# Altium PCB Kame_EXP_BRK.PcbDoc
Units mm, origin at the board's own origin, x right, y up, seen from the top; angles counter-clockwise.
Board outline 26 x 35 mm, 4 copper layers (Top, GND, L3, Bottom), stack 0.806 mm thick; 48 components, 28 nets, 191 pads, 91 vias.
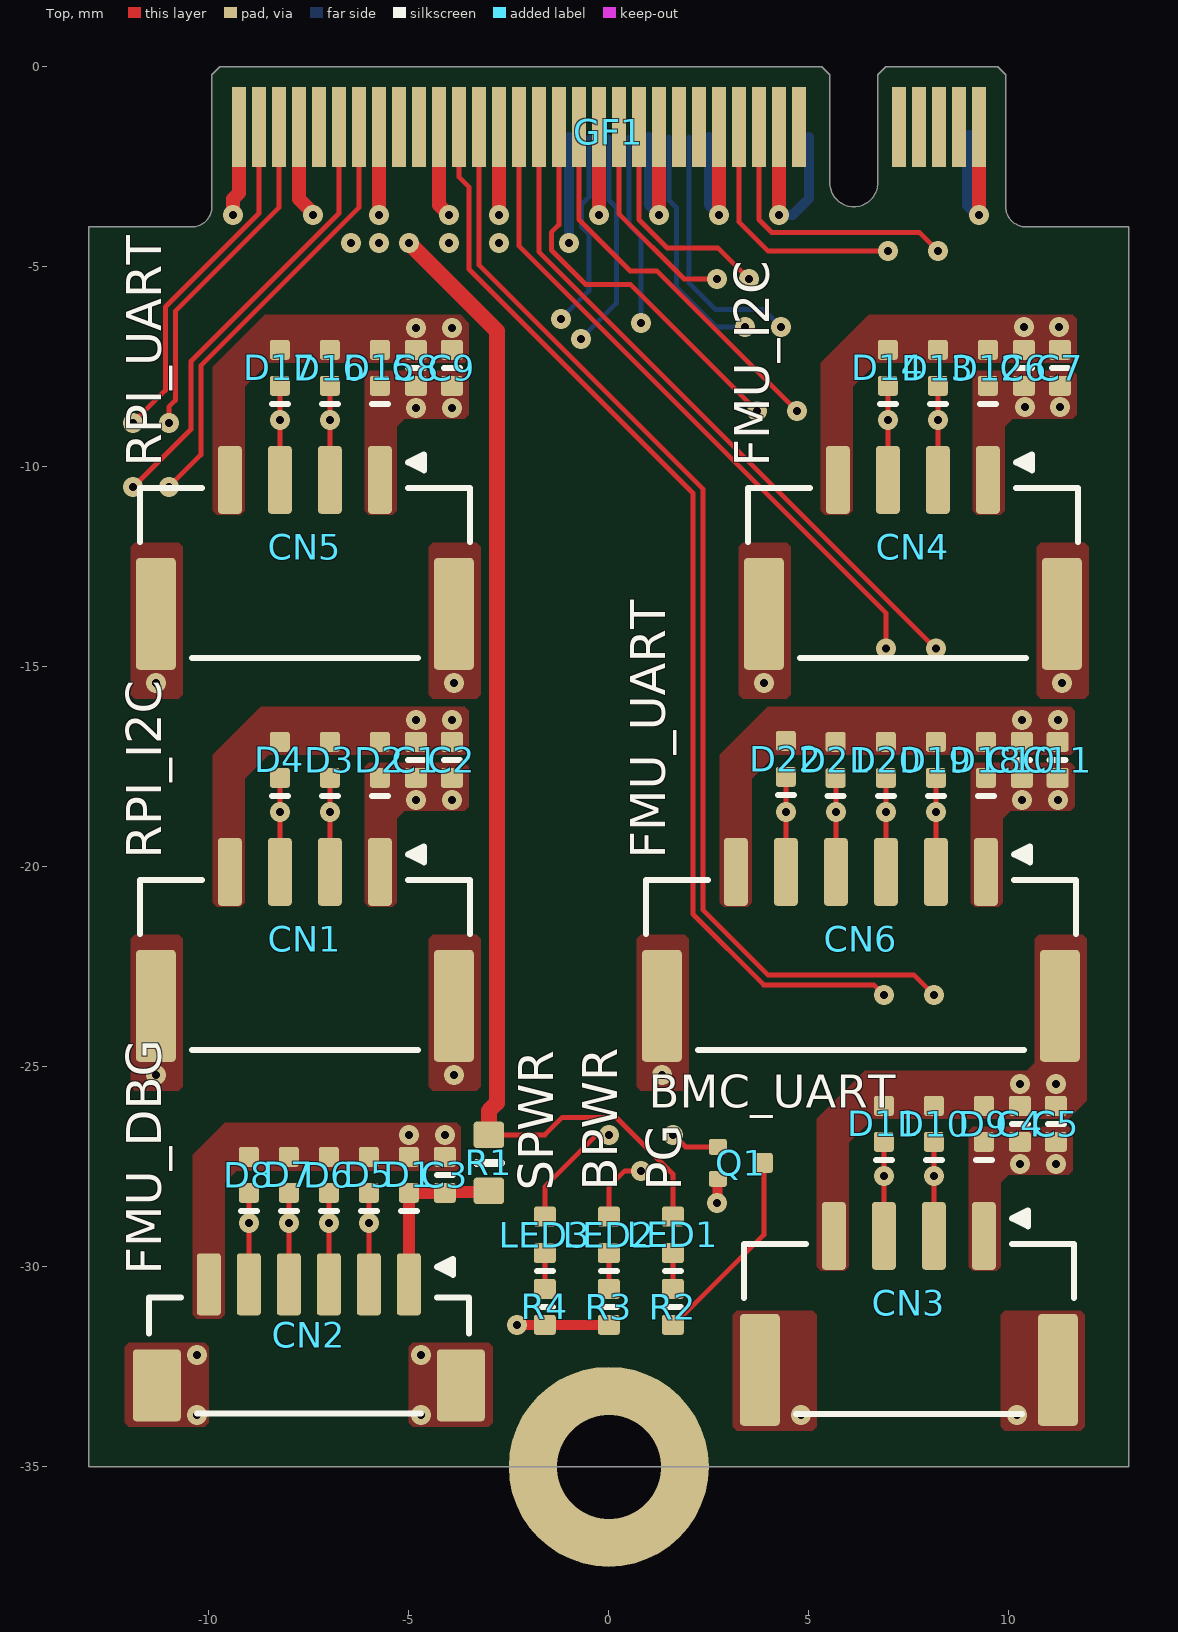
[diagram p0: Top view]
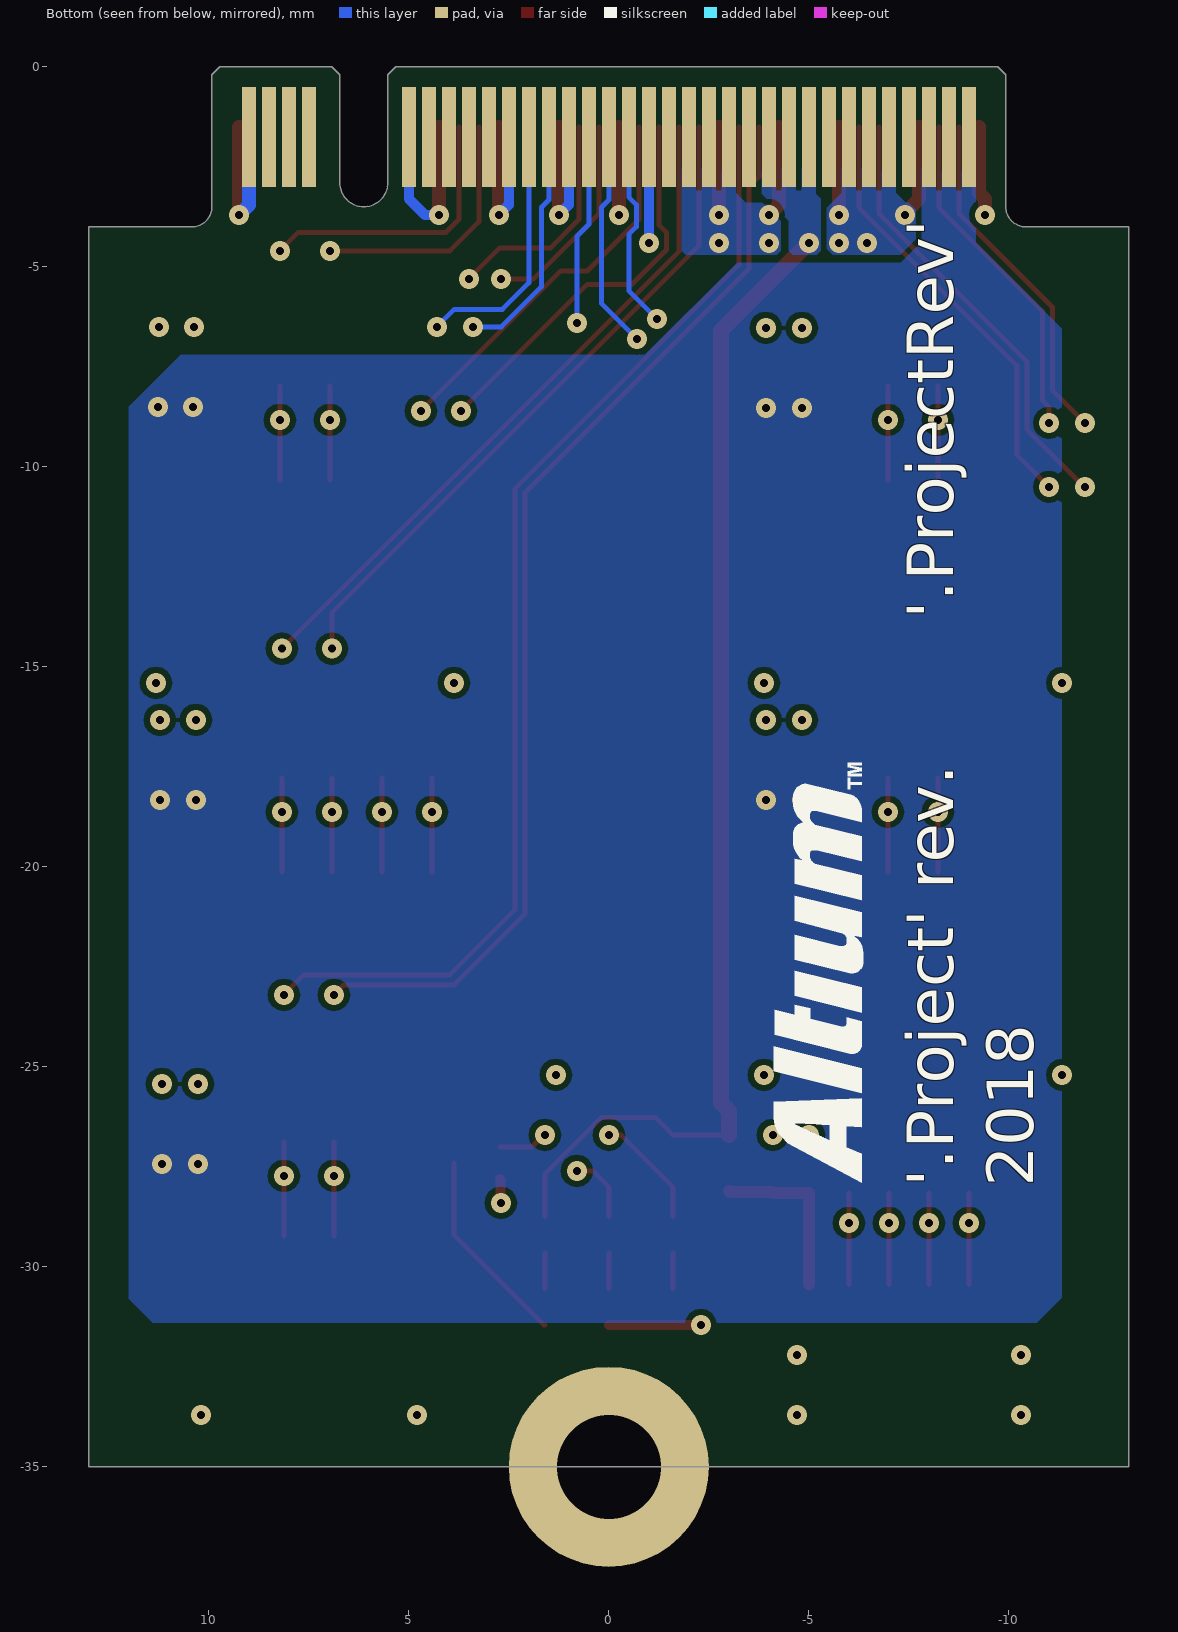
[diagram p1: Bottom view, seen from below]
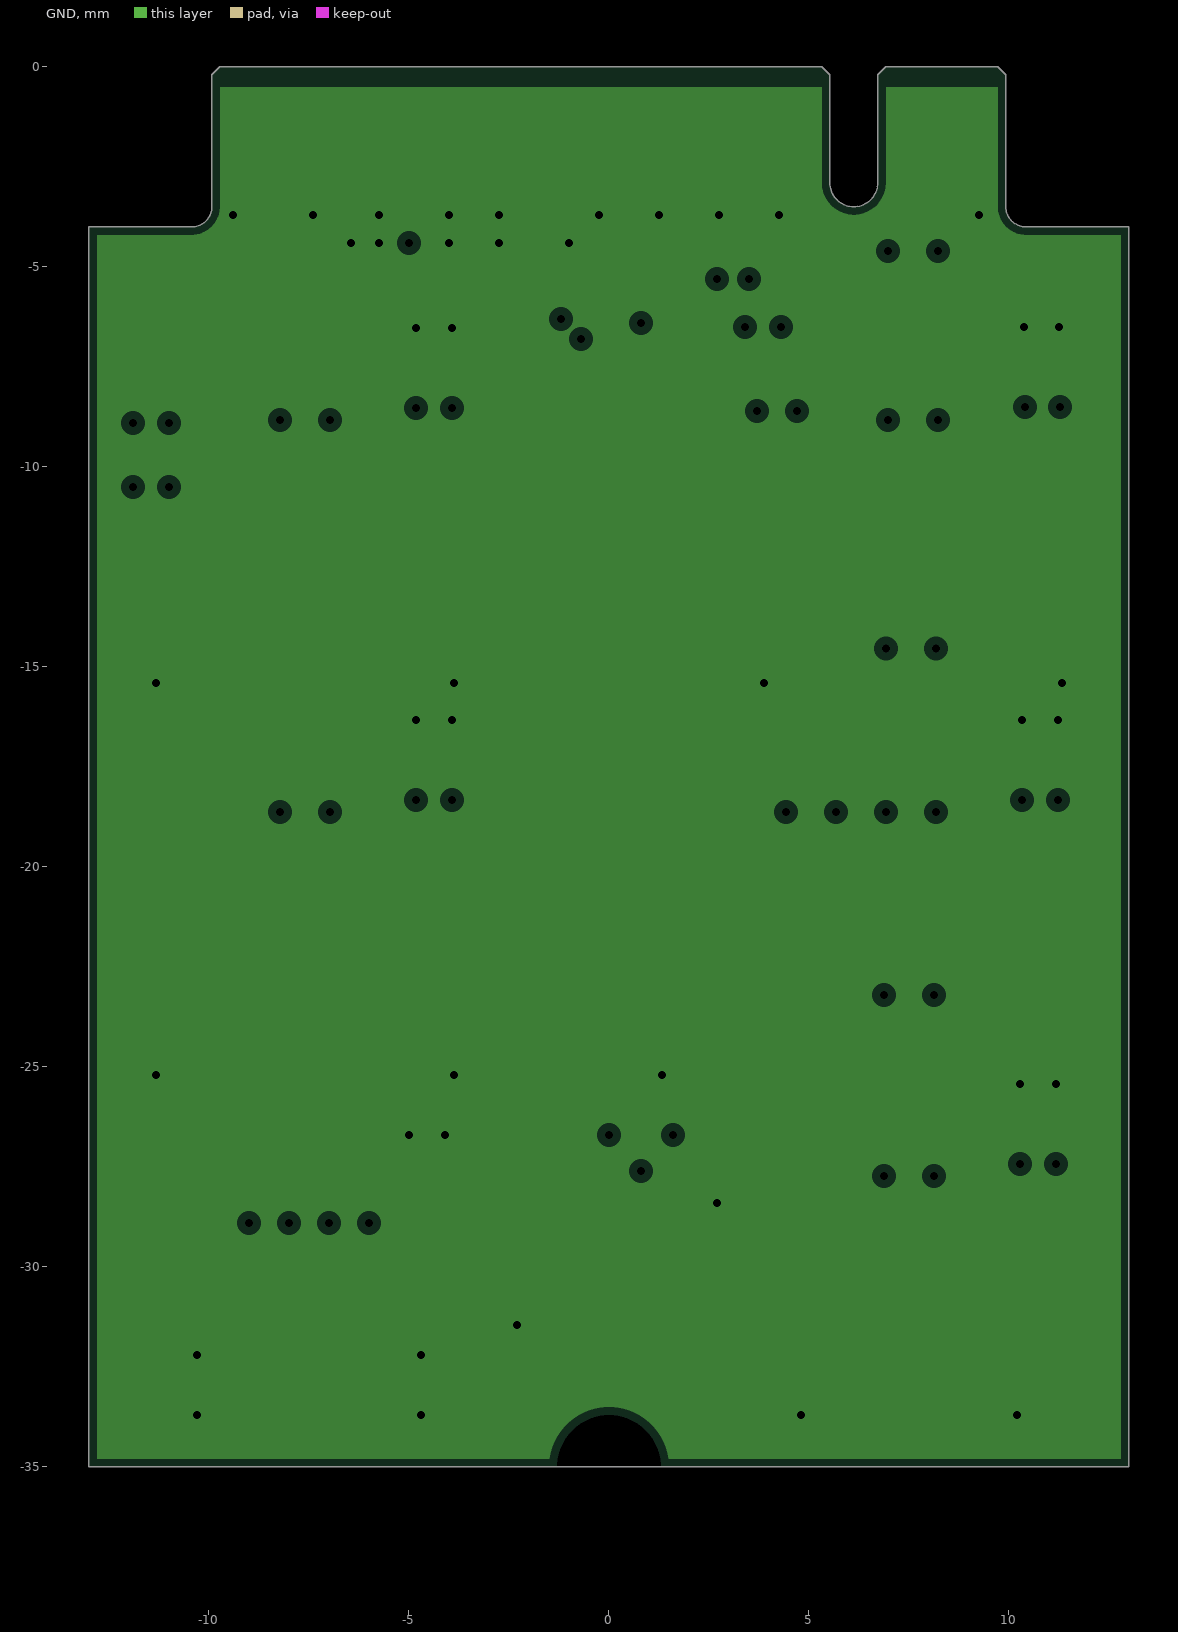
[diagram p2: GND, clearances drawn from the general rule]
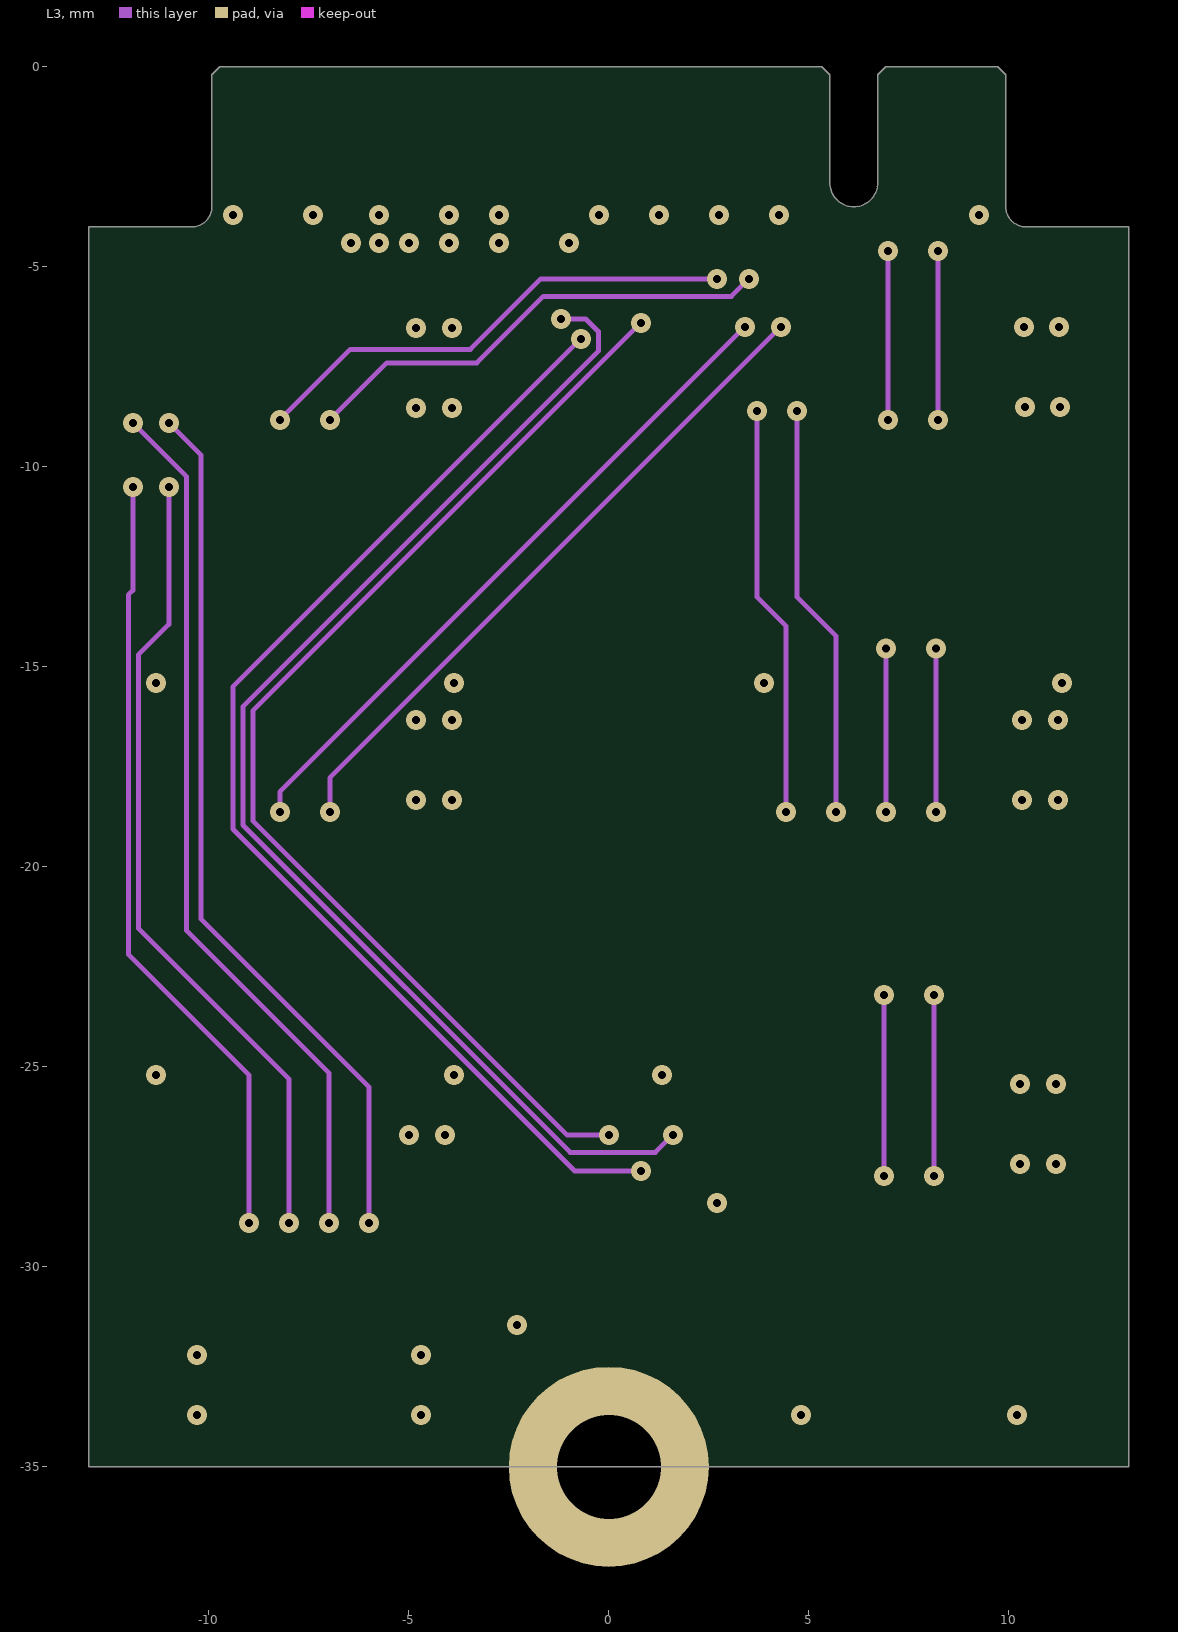
[diagram p3: L3]
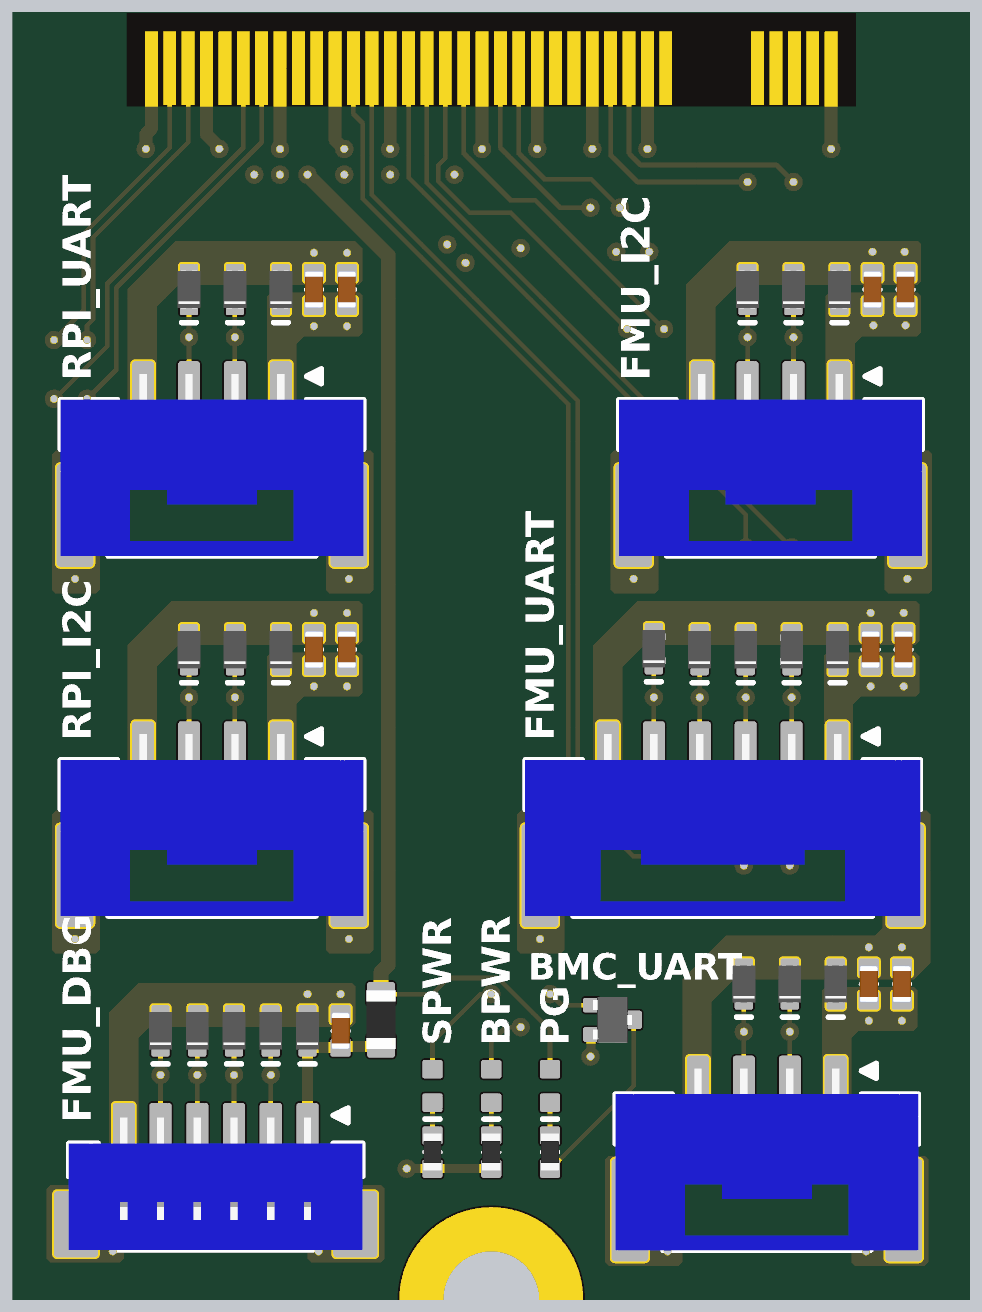
[diagram p4: 3D render of the assembled board from above, using the file's embedded part models]

## Layer stack, top to bottom
Top Solder: solder mask 0.0102, Solder Resist, Dk 3.5
Top: signal copper 0.0178
D1: dielectric 0.1, FR-4, Dk 4.2
GND: plane copper 0.035, net GND
D2: core 0.5, Core-009, Dk 4.6
L3: signal copper 0.035
D3: prepreg 0.1, PP-006, Dk 4.2
Bottom: signal copper 0.018
Bottom Solder: solder mask 0.0102, Solder Resist, Dk 3.5

## Board outline
-9.925,-0.2 -9.925,-3.5 cw(c-10.425,-3.5) -10.425,-4 -13,-4 -13,-35 13,-35 13,-4 10.425,-4 cw(c10.425,-3.5) 9.925,-3.5 9.925,-0.2 9.725,0 6.925,0 6.725,-0.2 6.725,-2.9 cw(c6.125,-2.9) 6.125,-3.5 cw(c6.125,-2.9) 5.525,-2.9 5.525,-0.2 5.325,0 -9.725,0

## Design rules (kind name [scope] priority, off if disabled: settings)
BoardOutlineClearance [All] p1: gap=0.25 ignorepadtopadclearanceinfootprint=FALSE
Clearance "Polygon clearance" [InPolygon and (OnLayer('Top') or OnLayer('Bottom') or OnLayer('L3'))] p1: gap=0.15 ignorepadtopadclearanceinfootprint=FALSE except(0.2: Arc-Hole Track-Hole SMDPad-Hole THPad-Hole Via-Hole Fill-Hole Poly-Hole Region-Hole Text-Hole)
Clearance [All] p2: gap=0.125 ignorepadtopadclearanceinfootprint=FALSE
HoleSize [All] p1: absolutevalues=TRUE maxlimit=6 minlimit=0.2 maxpercent=80.000 minpercent=20.000
HoleToHoleClearance [All] p1: gap=0.2 allowstackedmicrovias=FALSE
MinimumAnnularRing [All] p1: minimumring=0.15
MinimumSolderMaskSliver [All] p1: minsoldermaskwidth=0.15
NetAntennae [All] p1 off: netantennaetolerance=0
PlaneClearance [All] p1: clearance=0.2
PlaneConnect [All] p1: planeconnectstyle=Direct reliefexpansion=0.15 reliefentries=4 reliefconductorwidth=0.25 reliefairgap=0.2
PolygonConnect [All] p1: connectstyle=Direct reliefconductorwidth=0.25 reliefentries=4 polygonreliefangle="90 Angle" airgapwidth=0.2
RoutingVias [All] p1: holewidth=0.2 width=0.5 viastyle="Through Hole" minholewidth=0.2 minwidth=0.5 maxholewidth=0.3 maxwidth=0.6
SilkToSilkClearance [All] p1: silktosilkclearance=0.1
SilkToSolderMaskClearance [IsPad] p1: minsilkscreentomaskgap=0.1 clearancetoexposedcopper=TRUE
SolderMaskExpansion [All] p1: expansion=0.05 istentingtop=FALSE
Width [All] p1: maxlimit=0.8 minlimit=0.125 preferedwidth=0.125
22 further rules are at their usual default settings.

## Classes and differential pairs
component class 1_mb_conn: GF1

## Components (designator, comment, footprint, x,y, rotation, side; value= is the part's Value field where it differs from the comment)
C1 "Capacitor 10nF +/-20% 50V 0402" CAPC0402(1005)60_L -4.825,-17.325 r90 top value=10nF
C2 "Capacitor 100nF +/-20% 10V 0402" CAPC0402(1005)60_L -3.925,-17.325 r90 top value=100nF
C3 "Capacitor 100nF +/-20% 10V 0402" CAPC0402(1005)60_L -4.1,-27.7 r90 top value=100nF
C4 "Capacitor 10nF +/-20% 50V 0402" CAPC0402(1005)60_L 10.275,-26.425 r90 top value=10nF
C5 "Capacitor 100nF +/-20% 10V 0402" CAPC0402(1005)60_L 11.175,-26.425 r90 top value=100nF
C6 "Capacitor 10nF +/-20% 50V 0402" CAPC0402(1005)60_L 10.375,-7.525 r90 top value=10nF
C7 "Capacitor 100nF +/-20% 10V 0402" CAPC0402(1005)60_L 11.275,-7.525 r90 top value=100nF
C8 "Capacitor 10nF +/-20% 50V 0402" CAPC0402(1005)60_L -4.825,-7.525 r90 top value=10nF
C9 "Capacitor 100nF +/-20% 10V 0402" CAPC0402(1005)60_L -3.925,-7.525 r90 top value=100nF
C10 "Capacitor 10nF +/-20% 50V 0402" CAPC0402(1005)60_L 10.325,-17.325 r90 top value=10nF
C11 "Capacitor 100nF +/-20% 10V 0402" CAPC0402(1005)60_L 11.22,-17.325 r90 top value=100nF
CN1 "BM04B-GHS-TBT" JST-BM04B-GHS-TBT_V -7.6,-21.8 r180 top
CN2 "BM06B-SRSS-TB" JST-BM06B-SRSS-TB_V -7.5,-31.7 r180 top
CN3 "BM04B-GHS-TBT" JST-BM04B-GHS-TBT_V 7.5,-30.9 r180 top
CN4 "BM04B-GHS-TBT" JST-BM04B-GHS-TBT_V 7.6,-12 r180 top
CN5 "BM04B-GHS-TBT" JST-BM04B-GHS-TBT_V -7.6,-12 r180 top
CN6 "BM06B-GHS-TBT" JST-BM06B-GHS-TBT_V 6.3,-21.8 r180 top
D1 "ESDALC5-1BM2" STM-SOD-882_V -5,-27.7 r90 top
D2 "ESDALC5-1BM2" STM-SOD-882_V -5.725,-17.325 r90 top
D3 "ESDALC5-1BM2" STM-SOD-882_V -6.975,-17.325 r90 top
D4 "ESDALC5-1BM2" STM-SOD-882_V -8.225,-17.325 r90 top
D5 "ESDALC5-1BM2" STM-SOD-882_V -6,-27.7 r90 top
D6 "ESDALC5-1BM2" STM-SOD-882_V -7,-27.7 r90 top
D7 "ESDALC5-1BM2" STM-SOD-882_V -8,-27.7 r90 top
D8 "ESDALC5-1BM2" STM-SOD-882_V -9,-27.7 r90 top
D9 "ESDALC5-1BM2" STM-SOD-882_V 9.375,-26.425 r90 top
D10 "ESDALC5-1BM2" STM-SOD-882_V 8.125,-26.425 r90 top
D11 "ESDALC5-1BM2" STM-SOD-882_V 6.875,-26.425 r90 top
D12 "ESDALC5-1BM2" STM-SOD-882_V 9.475,-7.525 r90 top
D13 "ESDALC5-1BM2" STM-SOD-882_V 8.225,-7.525 r90 top
D14 "ESDALC5-1BM2" STM-SOD-882_V 6.975,-7.525 r90 top
D15 "ESDALC5-1BM2" STM-SOD-882_V -5.725,-7.525 r90 top
D16 "ESDALC5-1BM2" STM-SOD-882_V -6.975,-7.525 r90 top
D17 "ESDALC5-1BM2" STM-SOD-882_V -8.225,-7.525 r90 top
D18 "ESDALC5-1BM2" STM-SOD-882_V 9.425,-17.325 r90 top
D19 "ESDALC5-1BM2" STM-SOD-882_V 8.175,-17.325 r90 top
D20 "ESDALC5-1BM2" STM-SOD-882_V 6.925,-17.325 r90 top
D21 "ESDALC5-1BM2" STM-SOD-882_V 5.67,-17.325 r90 top
D22 "ESDALC5-1BM2" STM-SOD-882_V 4.425,-17.3 r90 top
GF1 "NGFF-M-CN-2S-M-R67" NGFF-M-GF-2D-500-1K-S67 0,-1.5 r0 top locked
LED1 "QBLP595-IG" QTB-QBLP595_V 1.6,-29.2 r90 top
LED2 "QBLP595-IG" QTB-QBLP595_V 0,-29.2 r90 top
LED3 "QBLP595-IG" QTB-QBLP595_V -1.6,-29.2 r90 top
Q1 "RUM002N05T2L" ROHM-SOT723-3_V 3.3,-27.4 r0 top
R1 "Jumper 0603" RESC0603(1608)_L -3,-27.4 r270 top value=0
R2 "Resistor 10K  +/-1 % 0402 63 mW" RESC0402(1005)_L 1.6,-31 r270 top value=10k
R3 "Resistor 10K  +/-1 % 0402 63 mW" RESC0402(1005)_L 0,-31 r270 top value=10k
R4 "Resistor 10K  +/-1 % 0402 63 mW" RESC0402(1005)_L -1.6,-31 r270 top value=10k

## Footprints (in the part's own frame and the unit in brackets; to place one, negate y for a bottom-side part, rotate by r counter-clockwise, add the part's x,y. Pads: shape width x height; smd on the part's side, far side on the other; paste and mask are expansions set on the pad)
CAPC0402(1005)60_L [mm] "Chip Capacitor, Body 1.0x0.5mm, Height 0.6mm, IPC High Density"
  rrect25% 0.5x0.55 smd: 1(-0.45,0) 2(0.45,0)
  silkscreen extent 0,-0.2 0,0.2, body extent -0.5,-0.25 0.5,0.25, height 0.6
JST-BM04B-GHS-TBT_V [mm] "Connector, 4-Leads, Body 8.25x4.25mm, Pitch 1.25mm"
  rrect30% 0.6x1.7 smd: 1(-1.875,-1.675) 2(-0.625,-1.675) 3(0.625,-1.675) 4(1.875,-1.675)
  rrect20% 1x2.8 smd: MP1(-3.725,1.675) MP2(3.725,1.675)
  silkscreen extent -4.13,-2.31 4.13,2.78, body extent -4.13,-2.18 4.12,2.77, height 4.21
JST-BM06B-GHS-TBT_V [mm] "Connector, 6-Leads, Body 10.75x4.25mm, Pitch 1.25mm"
  rrect30% 0.6x1.7 smd: 1(-3.125,-1.675) 2(-1.875,-1.675) 3(-0.625,-1.675) 4(0.625,-1.675) 5(1.875,-1.675) 6(3.125,-1.675)
  rrect20% 1x2.8 smd: MP1(-4.975,1.675) MP2(4.975,1.675)
  silkscreen extent -5.38,-2.31 5.38,2.78, body extent -5.38,-2.17 5.37,2.78, height 4.2
JST-BM06B-SRSS-TB_V [mm] "SMD, 6-Leads, Body 2.9x8mm, Pitch 1mm"
  rrect25% 0.6x1.55 smd: 1(-2.5,-1.262) 2(-1.5,-1.262) 3(-0.5,-1.262) 4(0.5,-1.262) 5(1.5,-1.262) 6(2.5,-1.262)
  rrect15% 1.2x1.8 smd: MP1(-3.8,1.263) MP2(3.8,1.263)
  silkscreen extent -4,-1.9 4,1.96, body extent -4,-1.64 4,1.96, height 4.32
NGFF-M-GF-2D-500-1K-S67 [mm] "Golden finger, NGFF key M, Dual, Staggered, Pitch 0.5mm, 47-Position"
  rect 0.35x2 smd paste-0.9: 1(-9.25,0) 3(-8.75,0) 5(-8.25,0) 7(-7.75,0) 9(-7.25,0) 11(-6.75,0) 13(-6.25,0) 15(-5.75,0) 17(-5.25,0) 19(-4.75,0) 21(-4.25,0) 23(-3.75,0) 25(-3.25,0) 27(-2.75,0) 29(-2.25,0) 31(-1.75,0) 33(-1.25,0) 35(-0.75,0) 37(-0.25,0) 39(0.25,0) 41(0.75,0) 43(1.25,0) 45(1.75,0) 47(2.25,0) 49(2.75,0) 51(3.25,0) 53(3.75,0) 55(4.25,0) 57(4.75,0) 67(7.25,0) 69(7.75,0) 71(8.25,0) 73(8.75,0) 75(9.25,0)
  rect 0.35x2.5 smd far side paste-0.9: 2(-9,-0.25) 4(-8.5,-0.25) 6(-8,-0.25) 8(-7.5,-0.25) 10(-7,-0.25) 12(-6.5,-0.25) 14(-6,-0.25) 16(-5.5,-0.25) 18(-5,-0.25) 20(-4.5,-0.25) 22(-4,-0.25) 24(-3.5,-0.25) 26(-3,-0.25) 28(-2.5,-0.25) 30(-2,-0.25) 32(-1.5,-0.25) 34(-1,-0.25) 36(-0.5,-0.25) 38(0,-0.25) 40(0.5,-0.25) 42(1,-0.25) 44(1.5,-0.25) 46(2,-0.25) 48(2.5,-0.25) 50(3,-0.25) 52(3.5,-0.25) 54(4,-0.25) 56(4.5,-0.25) 58(5,-0.25) 68(7.5,-0.25) 70(8,-0.25) 72(8.5,-0.25) 74(9,-0.25)
QTB-QBLP595_V [mm] "SMD, 2-Leads, Body 1x0.5mm"
  rrect25% 0.5x0.55 smd: 1(-0.455,0) 2(0.455,0)
  silkscreen extent -0.9,-0.2 -0.9,0.2, body extent -0.5,-0.25 0.5,0.25, height 0.5
RESC0402(1005)_L [mm] "Chip Resistor, Body 1.0x0.5mm, IPC High Density"
  rrect25% 0.5x0.55 smd: 1(-0.45,0) 2(0.45,0)
  silkscreen extent 0,-0.2 0,0.2, body extent -0.5,-0.25 0.5,0.25, height 0.3
RESC0603(1608)_L [mm] "Chip Resistor, Body 1.6x0.8mm, IPC High Density"
  rrect25% 0.66x0.76 smd: 1(-0.7,0) 2(0.7,0)
  silkscreen extent 0,-0.3 0,0.3, body extent -0.8,-0.4 0.8,0.4, height 0.45
ROHM-SOT723-3_V [mm] "SOT723, 3-Leads, Body 1.2x0.8mm, Pitch 0.8mm"
  rrect30% 0.45x0.4 smd: 1(-0.575,0.4) 2(-0.575,-0.4)
  rrect30% 0.45x0.5 smd: 3(0.575,0)
  body extent -0.53,-0.63 0.53,0.63, height 0.45
STM-SOD-882_V [mm] "SOD-882, 2-Leads, Body 1x0.6mm"
  rrect25% 0.5x0.5 smd: 1(-0.45,0) 2(0.45,0)
  silkscreen extent -0.9,-0.2 -0.9,0.2, body extent -0.51,-0.31 0.51,0.31, height 0.49

## Part data
C1 C4 C6 C8 C10: library part CMP-001-00069-3, "Chip Capacitor, 10nF +/-20%, 50V, 0402, Thickness 0.6 mm", Case/Package=0402, Max Operating Temperature=85°C, Min Operating Temperature=-55°C, Tolerance=5%, Voltage Rating=50V, Mounting Technology=SMT, Pins=2
C2 C3 C5 C7 C9 C11: library part CMP-001-00061-3, "Chip Capacitor, 100nF +/-20%, 10V, 0402, Thickness 0.6 mm", Case/Package=0402, Max Operating Temperature=85°C, Min Operating Temperature=-55°C, Tolerance=20%, Voltage Rating=10V, Mounting Technology=SMT, Pins=2
CN1 CN3 CN4 CN5: library part CMP-002-00053-3, "Header, Pitch 1.25 mm, 1 x 4 Position, Height 4.05 mm, -25 to 85 degC", Pins=6
CN2: library part CMP-002-00052-3, "Header, Pitch 1 mm, 1 x 6 Position, Height 4.25 mm, -25 to 85 degC", Connector Type=Header,Shrouded, Pins=8
CN6: library part CMP-002-00054-4, "Header, Pitch 1.25 mm, 1 x 6 Position, Height 4.05 mm, -25 to 85 degC", Pins=8
D1 D2 D3 D4 D5 D6 D7 D8 D9 D10 D11 D12 D13 D14 D15 D16 D17 D18 D19 D20 D21 D22: library part CMP-004-00030-3, "Single Line Low Capacitance Transil™, 5 V, -55 to 150 degC, 2-Pin SOD-882, RoHS, Tape and Reel", Mounting Technology=SMT, Pins=2
GF1: library part CMP-002-00069-3, "Golden finger, NGFF key M, Dual, Staggered, Pitch 0.5mm, 67-Position", Pins=67
LED1 LED2 LED3: library part CMP-007-00041-3, "Chip LED 0402, Green, 0.02 A, 3.1 to 3.7 V, -40 to 80 degC, 2-Pin SMD, RoHS, Tape and Reel", Case/Package=0402, Colour=Green, Mounting Technology=SMT, Pins=2, RoHS Compliant=Yes
Q1: library part CMP-013-00026-2, "Nch Small Signal MOSFET, 50 V, 200 mA, 3-Pin SOT723, RoHS, Tape and Reel", Pins=3, Vgs(th) (Max) @ Id=1V@1mA
R1: library part CMP-009-00175-3, Case/Package=0603, Max Operating Temperature=155°C, Min Operating Temperature=-55°C, Pins=2
R2 R3 R4: library part CMP-009-00149-3, "Chip Resistor, 10 kOhms, +/-1 %, 63 mW, -55 to 125 degC, 0402", Case/Package=0402, Max Operating Temperature=155°C, Min Operating Temperature=-55°C, Power=63mW, Tolerance=1%, Pins=2

## Free pads (board coordinates)
  round 5 hole 2.6: MH1(0,-35)

## Via types
v1: diameter 0.5, hole 0.2, Top to Bottom, tented both sides, 91 vias

## Nets (pads, with @x,y where several pads share a name; then routed paths per layer and width w, separated by ;. In a path a pad name is that pad's centre, name@x,y a point inside that pad or via, vN(x,y) a via of type N, cw(c..) or ccw(c..) an arc to the next point about the centre after c; other vN are vias at no path point)
BPWR_ON: GF1.38 LED2.2 | length 36.8
  Top w0.125: LED2.2 0,-28 0.4,-27.6 v1(0.8,-27.6)
  L3 w0.125: v1(-0.7,-6.8) -9.4,-15.5 -9.4,-19.056 -0.856,-27.6 v1(0.8,-27.6)
  Bottom w0.125: v1(-0.7,-6.8) 0.187,-5.913 0.187,-3.519 0,-3.331 GF1.38
E_PG: GF1.36 Q1.1 | length 37.7
  Top w0.125: v1(1.6,-26.7) 1.619,-26.7 1.919,-27 Q1.1
  L3 w0.125: v1(-1.2,-6.3) -0.581,-6.3 -0.262,-6.619 -0.262,-7.109 -9.15,-15.996 -9.15,-18.953 -0.965,-27.138 1.162,-27.138 v1(1.6,-26.7)
  Bottom w0.125: v1(-1.2,-6.3) -0.5,-5.6 -0.5,-4.188 -0.688,-4 -0.688,-3.447 -0.5,-3.259 GF1.36
EXP_BMC_RX: CN3.3 D11.1 GF1.23 | length 34.6
  Top w0.125: GF1.23 -3.75,-2.75 -3.5,-3 -3.5,-5.054 2.1,-10.654 2.1,-21.179 3.871,-22.95 6.625,-22.95 v1(6.875,-23.2) ; CN3.3 v1(6.875,-27.725) D11.1
  L3 w0.125: v1(6.875,-27.725) v1(6.875,-23.2)
EXP_BMC_TX: CN3.2 D10.1 GF1.25 | length 35.4
  Top w0.125: GF1.25 -3.25,-4.95 2.35,-10.55 2.35,-21.075 3.975,-22.7 7.625,-22.7 v1(8.125,-23.2) ; CN3.2 v1(8.125,-27.725) D10.1
  L3 w0.125: v1(8.125,-27.725) v1(8.125,-23.2)
FMU_I2C_SCL: CN4.2 D13.1 GF1.53 | length 13.7
  Top w0.125: GF1.53 3.75,-3.819 4.069,-4.138 7.762,-4.138 v1(8.225,-4.6) ; CN4.2 v1(8.225,-8.825) D13.1
  L3 w0.125: v1(8.225,-8.825) v1(8.225,-4.6)
FMU_I2C_SDA: CN4.3 D14.1 GF1.51 | length 13
  Top w0.125: GF1.51 3.25,-3.875 3.975,-4.6 v1(6.975,-4.6) ; CN4.3 v1(6.975,-8.825) D14.1
  L3 w0.125: v1(6.975,-8.825) v1(6.975,-4.6)
FMU_SWDCLK: CN2.5 D8.1 GF1.11 | length 33.1
  Top w0.125: v1(-11.9,-10.5) -11.881,-10.5 -10.45,-9.069 -10.45,-7.369 -6.75,-3.669 GF1.11 ; CN2.5 v1(-9,-28.9) D8.1
  L3 w0.125: v1(-11.9,-10.5) -11.9,-13.087 -12.012,-13.199 -12.012,-22.188 -9,-25.2 v1(-9,-28.9)
FMU_SWDIO: CN2.4 D7.1 GF1.13 | length 33.5
  Top w0.125: v1(-11,-10.5) -10.2,-9.7 -10.2,-7.472 -6.25,-3.522 GF1.13 ; CN2.4 v1(-8,-28.9) D7.1
  L3 w0.125: v1(-11,-10.5) -11,-13.936 -11.762,-14.699 -11.762,-21.538 -8,-25.3 v1(-8,-28.9)
FMU_UART7_RX: CN2.3 D6.1 GF1.3 | length 33
  Top w0.125: v1(-11.9,-8.9) -11.088,-8.088 -11.088,-6.006 -8.75,-3.669 GF1.3 ; CN2.3 v1(-7,-28.9) D6.1
  L3 w0.125: v1(-11.9,-8.9) -10.562,-10.238 -10.562,-21.587 -7,-25.15 v1(-7,-28.9)
FMU_UART7_TX: CN2.2 D5.1 GF1.5 | length 32.9
  Top w0.125: v1(-11,-8.9) -11,-8.5 -10.838,-8.338 -10.838,-6.11 -8.25,-3.522 GF1.5 ; CN2.2 v1(-6,-28.9) D5.1
  L3 w0.125: v1(-11,-8.9) -10.2,-9.7 -10.2,-21.3 -6,-25.5 v1(-6,-28.9)
FMU_UART_CTS: CN6.4 D21.1 GF1.35 | length 22.5
  Top w0.125: GF1.35 -0.75,-3.819 0.531,-5.1 1.2,-5.1 v1(4.7,-8.6) ; CN6.4 v1(5.675,-18.625) D21.1@5.675,-17.775
  L3 w0.125: v1(4.7,-8.6) 4.7,-13.25 5.675,-14.225 v1(5.675,-18.625)
FMU_UART_RTS: CN6.5 D22.1 GF1.33 | length 22.6
  Top w0.125: GF1.33 -1.25,-3.95 -1.438,-4.138 -1.438,-4.581 -0.581,-5.438 0.538,-5.438 v1(3.7,-8.6) ; CN6.5 v1(4.425,-18.625) D22.1@4.425,-17.775
  L3 w0.125: v1(3.7,-8.6) 3.7,-13.25 4.425,-13.975 v1(4.425,-18.625)
FMU_UART_RX: CN6.3 D20.1 GF1.29 | length 23.3
  Top w0.125: GF1.29 -2.25,-4.476 6.925,-13.651 v1(6.925,-14.547) ; CN6.3 v1(6.925,-18.625) D20.1
  L3 w0.125: v1(6.925,-18.625) v1(6.925,-14.547)
FMU_UART_TX: CN6.2 D19.1 GF1.31 | length 23.6
  Top w0.125: GF1.31 -1.75,-4.622 v1(8.175,-14.547) ; CN6.2 v1(8.175,-18.625) D19.1
  L3 w0.125: v1(8.175,-18.625) v1(8.175,-14.547)
GND: C1.2 C2.2 C3.2 C4.2 C5.2 C6.2 C7.2 C8.2 C9.2 C10.2 C11.2 CN1.4 CN1.MP1 CN1.MP2 CN2.6 CN2.MP1 CN2.MP2 CN3.4 CN3.MP1 CN3.MP2 CN4.4 CN4.MP1 CN4.MP2 CN5.4 CN5.MP1 CN5.MP2 CN6.6 CN6.MP1 CN6.MP2 D1.2 D2.2 D3.2 D4.2 D5.2 D6.2 D7.2 D8.2 D9.2 D10.2 D11.2 D12.2 D13.2 D14.2 D15.2 D16.2 D17.2 D18.2 D19.2 D20.2 D21.2 D22.2 GF1.1 GF1.7 GF1.10 GF1.12 GF1.14 GF1.15 GF1.21 GF1.26 GF1.27 GF1.28 GF1.30 GF1.34 GF1.37 GF1.42 GF1.43 GF1.48 GF1.49 GF1.55 GF1.58 GF1.74 GF1.75 Q1.2 R3.2 R4.2 | length 36.5
  Top w0.25: v1(-2.3,-31.45) R4.2 R3.2 ; v1(2.7,-28.4) 2.712,-28.387 2.712,-27.812 Q1.2
  Top w0.35: v1(-9.4,-3.7) -9.4,-3.3 -9.25,-3.15 GF1.1 ; GF1.7 -7.75,-3.309 -7.4,-3.659 v1(-7.4,-3.7) ; v1(-5.75,-3.7) GF1.15 ; GF1.21 -4.25,-3.45 v1(-4,-3.7) ; v1(-2.75,-3.7) GF1.27 ; v1(-0.25,-3.7) GF1.37 ; v1(1.25,-3.7) GF1.43 ; v1(2.75,-3.7) GF1.49 ; v1(4.25,-3.7) GF1.55 ; v1(9.25,-3.7) GF1.75
  Bottom w0.25: v1(-1,-4.4) GF1.34 ; GF1.42 1,-3.45 v1(1.25,-3.7) ; GF1.48 2.5,-3.45 v1(2.75,-3.7) ; v1(4.25,-3.7) 4.6,-3.7 5,-3.3 GF1.58
  Bottom w0.35: GF1.74 9,-3.45 v1(9.25,-3.7)
  other v1: -10.3,-33.7 -4.7,-33.7 4.8,-33.7 10.2,-33.7 -10.3,-32.2 -4.7,-32.2 -5,-26.7 -4.1,-26.7 10.275,-25.425 11.175,-25.425 -11.325,-25.2 -3.875,-25.2 1.325,-25.2 -4.825,-16.325 -3.925,-16.325 10.325,-16.325 11.225,-16.325 -11.325,-15.4 -3.875,-15.4 3.875,-15.4 11.325,-15.4 -4.825,-6.525 -3.925,-6.525 10.375,-6.5 11.25,-6.5 -6.45,-4.4 -5.75,-4.4 -4,-4.4 -2.75,-4.4
NetLED1_1: LED1.1 R2.1 | length 0.9
  Top w0.125: R2.1 LED1.1
NetLED2_1: LED2.1 R3.1 | length 0.9
  Top w0.125: R3.1 LED2.1
NetLED3_1: LED3.1 R4.1 | length 0.9
  Top w0.125: R4.1 LED3.1
NetQ1_3: Q1.3 R2.2 | length 5
  Top w0.125: R2.2 1.625,-31.45 3.875,-29.2 Q1.3
RPI_I2C_SCL: CN1.2 D3.1 GF1.46 | length 25.6
  Top w0.125: CN1.2 v1(-6.975,-18.625) D3.1
  L3 w0.125: v1(-6.975,-18.625) -6.975,-17.775 v1(4.3,-6.5)
  Bottom w0.125: GF1.46 2,-5.4 2.662,-6.062 3.862,-6.062 v1(4.3,-6.5)
RPI_I2C_SDA: CN1.3 D4.1 GF1.44 | length 25.2
  Top w0.125: CN1.3 v1(-8.225,-18.625) D4.1
  L3 w0.125: v1(-8.225,-18.625) -8.225,-18.125 v1(3.4,-6.5)
  Bottom w0.125: GF1.44 1.5,-3.331 1.687,-3.519 1.687,-5.5 2.687,-6.5 v1(3.4,-6.5)
RPI_UART_RX: CN5.3 D17.1 GF1.39 | length 20
  Top w0.125: CN5.3 v1(-8.225,-8.825) D17.1 ; GF1.39 0.25,-3.672 1.878,-5.3 v1(2.7,-5.3)
  L3 w0.125: v1(-8.225,-8.825) -6.462,-7.063 -3.463,-7.063 -1.7,-5.3 v1(2.7,-5.3)
RPI_UART_TX: CN5.2 D16.1 GF1.41 | length 20
  Top w0.125: CN5.2 v1(-6.975,-8.825) D16.1 ; GF1.41 0.75,-3.819 1.455,-4.523 2.723,-4.523 v1(3.5,-5.3)
  L3 w0.125: v1(-6.975,-8.825) -5.55,-7.4 -3.3,-7.4 -1.638,-5.738 3.062,-5.738 v1(3.5,-5.3)
SPWR_ON: GF1.40 LED3.2 | length 36.3
  Top w0.125: LED3.2 -1.6,-28 -0.3,-26.7 v1(0,-26.7)
  L3 w0.125: v1(0,-26.7) -1.049,-26.7 -8.9,-18.849 -8.9,-16.1 v1(0.8,-6.4)
  Bottom w0.125: GF1.40 0.5,-3.944 0.8,-4.244 v1(0.8,-6.4)
VCC3E: GF1.18 GF1.20 GF1.22 LED1.2 R1.1 | length 29.7
  Top w0.125: R1.1 -1.598,-26.7 -1.16,-26.262 0.181,-26.262 1.6,-27.681 LED1.2
  Top w0.4: v1(-5,-4.4) -2.8,-6.6 -2.8,-25.9 -3,-26.1 R1.1
VCC3E_CN: C3.1 CN2.1 D1.1 R1.2 | length 4.3
  Top w0.3: CN2.1 D1.1 C3.1 -4.075,-28.125 -3.025,-28.125 R1.2
VCC3SW: GF1.32
VCC5E: C1.1 C2.1 C4.1 C5.1 C6.1 C7.1 C8.1 C9.1 C10.1 C11.1 CN1.1 CN3.1 CN4.1 CN5.1 CN6.1 D2.1 D9.1 D12.1 D15.1 D18.1 GF1.2 GF1.4 GF1.6
  other v1: 10.275,-27.425 11.175,-27.425 -4.825,-18.325 -3.925,-18.325 10.325,-18.325 11.225,-18.325 -4.825,-8.525 -3.925,-8.525 10.4,-8.5 11.275,-8.5
pads on no net: GF1.8 GF1.9 GF1.16 GF1.17 GF1.19 GF1.24 GF1.45 GF1.47 GF1.50 GF1.52 GF1.54 GF1.56 GF1.57 GF1.67 GF1.68 GF1.69 GF1.70 GF1.71 GF1.72 GF1.73

## Polygon pours and split planes (outlines as drawn)
GND on Top "GND_L01_P110" (solid, pour order 110): -9.6,-31.2 -9.7,-31.3 -10.3,-31.3 -10.4,-31.2 -10.4,-27.2 -9.6,-26.4 -3.8,-26.4 -3.7,-26.5 -3.7,-27.5 -3.8,-27.6 -9.3,-27.6 -9.6,-27.9
GND on Top "Top-GND" (solid, pour order 106): 6,-26.9 6.6,-26.3 11.5,-26.3 11.6,-26.2 11.95,-25.85 11.95,-21.8 11.85,-21.7 10.75,-21.7 10.65,-21.8 10.65,-24.9 10.45,-25.1 6.4,-25.1 5.2,-26.3 5.2,-30 5.3,-30.1 5.9,-30.1 6,-30
GND on Top "GND_L01_P100" (solid, pour order 100): -11.95,-21.8 -11.85,-21.7 -10.75,-21.7 -10.65,-21.8 -10.65,-25.5 -10.75,-25.6 -11.85,-25.6 -11.95,-25.5
GND on Top "GND_L01_P098" (solid, pour order 98): -4.5,-21.8 -4.4,-21.7 -3.3,-21.7 -3.2,-21.8 -3.2,-25.5 -3.3,-25.6 -4.4,-25.6 -4.5,-25.5
GND on Top "GND_L01_P096" (solid, pour order 96): 0.7,-21.8 0.8,-21.7 1.9,-21.7 2,-21.8 2,-25.5 1.9,-25.6 0.8,-25.6 0.7,-25.5
GND on Top "GND_L01_P094" (solid, pour order 94): 10.7,-12 10.8,-11.9 11.9,-11.9 12,-12 12,-15.7 11.9,-15.8 10.8,-15.8 10.7,-15.7
GND on Top "GND_L01_P092" (solid, pour order 92): 3.25,-12 3.35,-11.9 4.45,-11.9 4.55,-12 4.55,-15.7 4.45,-15.8 3.35,-15.8 3.25,-15.7
GND on Top "GND_L01_P090" (solid, pour order 90): -4.5,-12 -4.4,-11.9 -3.3,-11.9 -3.2,-12 -3.2,-15.7 -3.3,-15.8 -4.4,-15.8 -4.5,-15.7
GND on Top "GND_L01_P088" (solid, pour order 88): -11.95,-12 -11.85,-11.9 -10.75,-11.9 -10.65,-12 -10.65,-15.7 -10.75,-15.8 -11.85,-15.8 -11.95,-15.7
GND on Top "GND_L01_P086" (solid, pour order 86): 3.575,-17.8 4.175,-17.2 11.55,-17.2 11.65,-17.1 11.65,-16.1 11.55,-16 3.975,-16 2.775,-17.2 2.775,-20.9 2.875,-21 3.475,-21 3.575,-20.9
VCC5E on Top "VCC5E_L01_P082" (solid, pour order 82): 9.15,-21 9.05,-20.9 9.05,-17.5 9.15,-17.4 11.55,-17.4 11.65,-17.5 11.65,-18.5 11.55,-18.6 10.05,-18.6 9.85,-18.8 9.85,-20.9 9.75,-21
VCC5E on Top "VCC5E_L01_P080" (solid, pour order 80): 9.1,-30.1 9,-30 9,-26.6 9.1,-26.5 11.5,-26.5 11.6,-26.6 11.6,-27.6 11.5,-27.7 10,-27.7 9.8,-27.9 9.8,-30 9.7,-30.1
VCC5E on Top "VCC5E_L01_P076" (solid, pour order 76): -6,-21 -6.1,-20.9 -6.1,-17.5 -6,-17.4 -3.6,-17.4 -3.5,-17.5 -3.5,-18.5 -3.6,-18.6 -5.1,-18.6 -5.3,-18.8 -5.3,-20.9 -5.4,-21
GND on Top "GND_L01_P074" (solid, pour order 74): -9.1,-17.8 -8.5,-17.2 -3.6,-17.2 -3.5,-17.1 -3.5,-16.1 -3.6,-16 -8.7,-16 -9.9,-17.2 -9.9,-20.9 -9.8,-21 -9.2,-21 -9.1,-20.9
VCC5E on Top "VCC5E_L01_P072" (solid, pour order 72): -6,-11.2 -6.1,-11.1 -6.1,-7.7 -6,-7.6 -3.6,-7.6 -3.5,-7.7 -3.5,-8.7 -3.6,-8.8 -5.1,-8.8 -5.3,-9 -5.3,-11.1 -5.4,-11.2
GND on Top "GND_L01_P070" (solid, pour order 70): -9.1,-8 -8.5,-7.4 -3.6,-7.4 -3.5,-7.3 -3.5,-6.3 -3.6,-6.2 -8.6,-6.2 -9.9,-7.5 -9.9,-11.1 -9.8,-11.2 -9.2,-11.2 -9.1,-11.1
GND on Top "GND_L01_P068" (solid, pour order 68): 6.1,-8 6.7,-7.4 11.6,-7.4 11.7,-7.3 11.7,-6.3 11.6,-6.2 6.5,-6.2 5.3,-7.4 5.3,-11.1 5.4,-11.2 6,-11.2 6.1,-11.1
VCC5E on Top "VCC5E_L01_P066" (solid, pour order 66): 9.2,-11.2 9.1,-11.1 9.1,-7.7 9.2,-7.6 11.6,-7.6 11.7,-7.7 11.7,-8.7 11.6,-8.8 10.1,-8.8 9.9,-9 9.9,-11.1 9.8,-11.2
GND on Top "GND_L01_P050" (solid, pour order 50): -10.1,-34 -10,-33.9 -10,-32 -10.1,-31.9 -12,-31.9 -12.1,-32 -12.1,-33.9 -12,-34
GND on Top "GND_L01_P048" (solid, pour order 48): -4.9,-34 -5,-33.9 -5,-32 -4.9,-31.9 -3,-31.9 -2.9,-32 -2.9,-33.9 -3,-34
GND on Top "GND_L01_P038" (solid, pour order 38): 9.8,-34 9.9,-34.1 11.8,-34.1 11.9,-34 11.9,-31.2 11.8,-31.1 9.9,-31.1 9.8,-31.2
GND on Top "GND_L01_P034" (solid, pour order 34): 5.2,-34 5.1,-34.1 3.2,-34.1 3.1,-34 3.1,-31.2 3.2,-31.1 5.1,-31.1 5.2,-31.2
VCC5E on Bottom "VCC5E_L04_P054" (solid, pour order 54): -7.3,-4.9 -3.208,-4.9 -0.9,-7.2 10.7,-7.2 12,-8.5 12,-30.8 11.4,-31.4 -10.7,-31.4 -11.325,-30.775 -11.325,-6.55 -9.175,-4.4 -9.175,-2.55 -8.825,-2.55 -8.825,-3.075 -8.8,-3.1 -8.7,-3.1 -8.675,-3.075 -8.675,-2.55 -8.325,-2.55 -8.325,-3.075 -8.3,-3.1 -8.2,-3.1 -8.175,-3.075 -8.175,-2.55 -7.825,-2.55 -7.825,-4.375
GND on Bottom "GND_L04_P060" (solid, pour order 60): -5.825,-3.15 -5.4,-3.575 -5.4,-4.5 -5.6,-4.7 -7.7,-4.7 -7.7,-3.6 -7.5,-3.4 -7.425,-3.4 -7.175,-3.15 -7.175,-2.55 -6.825,-2.55 -6.825,-3.075 -6.8,-3.1 -6.7,-3.1 -6.675,-3.075 -6.675,-2.55 -6.325,-2.55 -6.325,-3.075 -6.3,-3.1 -6.2,-3.1 -6.175,-3.075 -6.175,-2.55 -5.825,-2.55
GND on Bottom "GND_L04_P058" (solid, pour order 58): -2.2,-3.1 -2.175,-3.075 -2.175,-2.55 -1.825,-2.55 -1.825,-4.6 -1.925,-4.7 -4.2,-4.7 -4.3,-4.6 -4.3,-3.6 -4.1,-3.4 -3.425,-3.4 -3.175,-3.15 -3.175,-2.55 -2.825,-2.55 -2.825,-3.075 -2.8,-3.1 -2.7,-3.1 -2.675,-3.075 -2.675,-2.55 -2.325,-2.55 -2.325,-3.075 -2.3,-3.1
VCC3E on Bottom "VCC3E_L04_P056" (solid, pour order 56): -4.5,-4.6 -4.5,-3.85 -3.825,-3.175 -3.825,-2.55 -4.175,-2.55 -4.175,-3.075 -4.2,-3.1 -4.3,-3.1 -4.325,-3.075 -4.325,-2.55 -4.675,-2.55 -4.675,-3.075 -4.7,-3.1 -4.8,-3.1 -4.825,-3.075 -4.825,-2.55 -5.175,-2.55 -5.175,-3.175 -5.3,-3.3 -5.3,-3.9 -5.3,-4.6 -5.2,-4.7 -4.6,-4.7
GND on GND (split plane): 9.723,-3.5 9.731,-3.61 9.757,-3.717 9.799,-3.819 9.857,-3.913 9.928,-3.997 10.012,-4.068 10.106,-4.126 10.208,-4.168 10.315,-4.194 10.425,-4.202 12.798,-4.202 12.798,-34.798 -12.798,-34.798 -12.798,-4.202 -10.425,-4.202 -10.315,-4.194 -10.208,-4.168 -10.106,-4.126 -10.012,-4.068 -9.928,-3.997 -9.857,-3.913 -9.799,-3.819 -9.757,-3.717 -9.731,-3.61 -9.723,-3.5 -9.723,-0.5 5.323,-0.5 5.323,-2.9 5.332,-3.026 5.362,-3.148 5.41,-3.264 5.476,-3.372 5.558,-3.467 5.653,-3.549 5.761,-3.615 5.877,-3.663 5.999,-3.693 6.125,-3.702 6.251,-3.693 6.373,-3.663 6.489,-3.615 6.597,-3.549 6.692,-3.467 6.774,-3.372 6.84,-3.264 6.888,-3.148 6.918,-3.026 6.927,-2.9 6.927,-0.5 9.723,-0.5

## Other copper
GND (plane layer: these items are gaps in the copper):
  rectangle: 6.7,-0.5 9.9,0
  rectangle: -9.9,-0.5 5.5,0

## Silkscreen, mask and mechanical layers (free items; w line width, h text height)
Top Overlay:
  text "RPI_UART" at -10.9,-10 h1.5 r90
  text "FMU_I2C" at 4.3,-10 h1.5 r90
  text "RPI_I2C" at -10.9,-19.8 h1.5 r90
  text "FMU_UART" at 1.7,-19.8 h1.5 r90
  text "BMC_UART" at 1,-26.3 h1.4
  text "SPWR" at -1.1,-28.1 h1.5 r90
  text "BPWR" at 0.5,-28.1 h1.5 r90
  text "PG" at 2.1,-28.1 h1.5 r90
  text "FMU_DBG" at -10.9,-30.2 h1.5 r90
Bottom Overlay:
  region: -6.322,-23.857 -6.322,-24.489 ccw(c-6.094,-24.439) -6.09,-24.672 -6.025,-24.672 -4.143,-24.2 -4.143,-23.575 -4.653,-23.704 -4.653,-23.445 -5.034,-23.537 -5.034,-23.796 -5.834,-24.001 -5.861,-24.001 cw(c-5.861,-23.914) -5.949,-23.914 -5.949,-23.763
  region: -5.866,-21.671 cw(c-5.827,-21.71) -5.827,-21.655 -4.653,-21.35 -4.653,-20.725 -6.322,-21.136 -6.322,-21.761 -6.139,-21.723 -6.139,-21.731 -6.219,-21.81 ccw(c-5.878,-22.152) -6.36,-22.152 -6.36,-22.381 ccw(c-6.081,-22.381) -6.081,-22.66 -6.025,-22.66 -4.653,-22.325 -4.653,-21.7 -5.789,-21.982 -5.865,-21.982 cw(c-5.865,-21.898) -5.949,-21.898 -5.949,-21.807 cw(c-5.82,-21.807) -5.911,-21.716
  region: -5.151,-18.942 -6.322,-19.239 -6.322,-19.864 -5.194,-19.582 -5.103,-19.582 cw(c-5.103,-19.658) -5.027,-19.658 -5.027,-19.735 cw(c-5.208,-19.735) -5.08,-19.864 -5.1,-19.884 cw(c-5.217,-19.767) -5.154,-19.92 -6.322,-20.214 -6.322,-20.839 -4.653,-20.428 -4.653,-19.795 -4.844,-19.833 -4.779,-19.768 ccw(c-5.191,-19.355) -4.608,-19.355 -4.608,-19.182 ccw(c-4.893,-19.182) -4.691,-18.98 -4.716,-18.955 ccw(c-4.859,-19.098) -4.859,-18.896 -4.859,-18.888 -4.786,-18.816 ccw(c-5.217,-18.385) -4.608,-18.385 -4.608,-18.256 -4.608,-18.248 ccw(c-4.935,-18.248) -4.935,-17.921 -6.063,-18.195 -6.124,-18.226 -6.208,-18.294 -6.261,-18.37 -6.299,-18.454 -6.322,-18.546 -6.322,-18.888 -5.171,-18.599 -5.11,-18.599 cw(c-5.11,-18.683) -5.027,-18.683 -5.027,-18.759 cw(c-5.192,-18.759) -5.075,-18.876 -5.122,-18.922 cw(c-5.187,-18.857) hole: -4.844,-19.833 -4.844,-19.841 -4.851,-19.841 -4.851,-19.833
  region: 11 vertices and 1 holes, not listed, extent -6.322,-27.895 -4.127,-25.785
  region: -6.032,-17.776 -6.032,-17.883 -6.322,-17.883 -6.322,-17.951 -6.032,-17.951 -6.032,-18.058 -5.971,-18.058 -5.971,-17.776
  region: -6.048,-17.471 -6.322,-17.524 -6.322,-17.608 -6.048,-17.662 -6.048,-17.669 -6.322,-17.669 -6.322,-17.738 -5.971,-17.738 -5.971,-17.616 -6.208,-17.566 -5.971,-17.517 -5.971,-17.395 -6.322,-17.395 -6.322,-17.464 -6.048,-17.464
  region: -4.653,-22.599 -6.322,-23.011 -6.322,-23.643 -4.653,-23.224
  region: -4.127,-24.482 -6.322,-25.038 -6.322,-25.663 -4.127,-25.114
  text "'.ProjectRev'" at -9,-13.8 h2 r270
  text "2018" at -11,-28 h2 r270
  text "'.Project' rev." at -9,-28 h2 r270
Mechanical 1:
  lines w0.15: 6.725,0 6.725,-2.9 cw(c6.125,-2.9) 5.525,-2.9 5.525,0 -9.925,0 -9.925,-3.5 cw(c-10.425,-3.5) -10.425,-4 -13,-4 -13,-35 13,-35 13,-4 10.425,-4 cw(c10.425,-3.5) 9.925,-3.5 9.925,0 6.725,0 ; 6.725,0 6.725,0

## Dimensions
13,-4 to 10,0 on Mechanical 13
-13,-35 to -10.2,0 on Mechanical 13
13,-35 to -13,-35 on Mechanical 13

## Text inside footprints (layer, text, board x,y; h text height)
GF1: Top Assembly "Board edge" at -1.1,0.2 h0.5